# Altium PCB Homodyne_detector.PcbDoc (part 1 of 2)
Units mm, origin at the board's own origin, x right, y up, seen from the top; angles counter-clockwise.
Board outline 120.15 x 50.65 mm, 2 copper layers (TOP, BOT), stack 1.57 mm thick; 115 components, 51 nets, 316 pads, 138 vias.
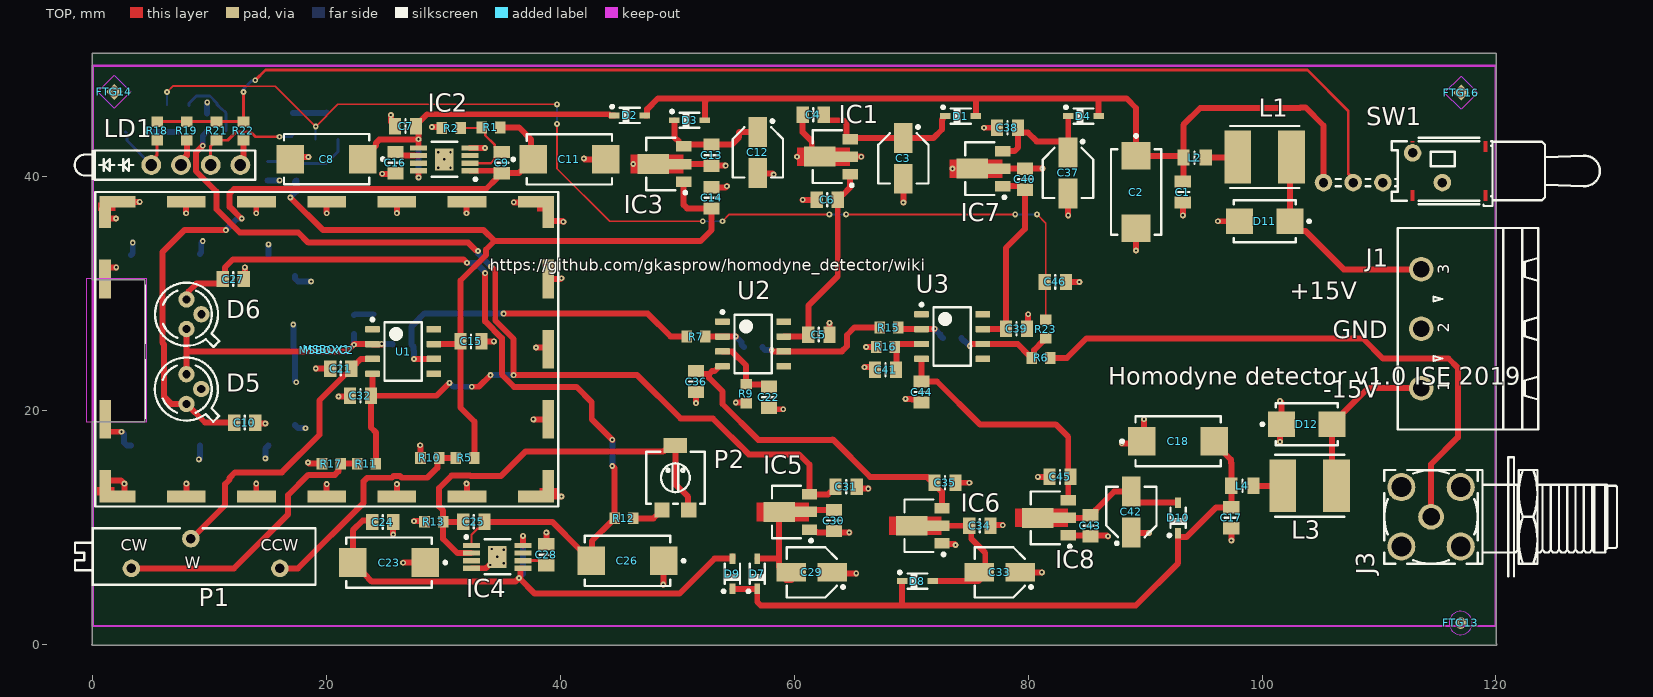
[diagram p0: TOP view]
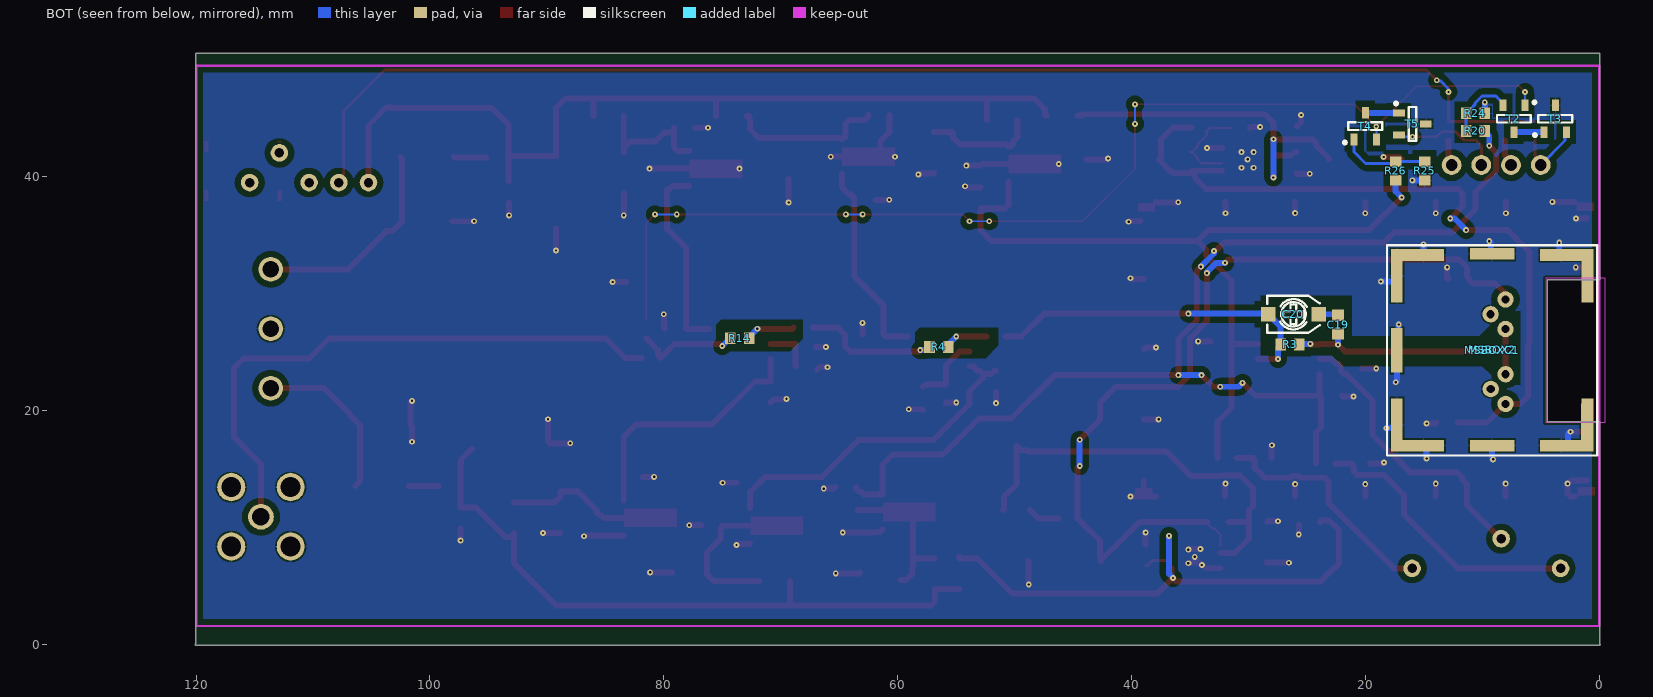
[diagram p1: BOT view, seen from below]
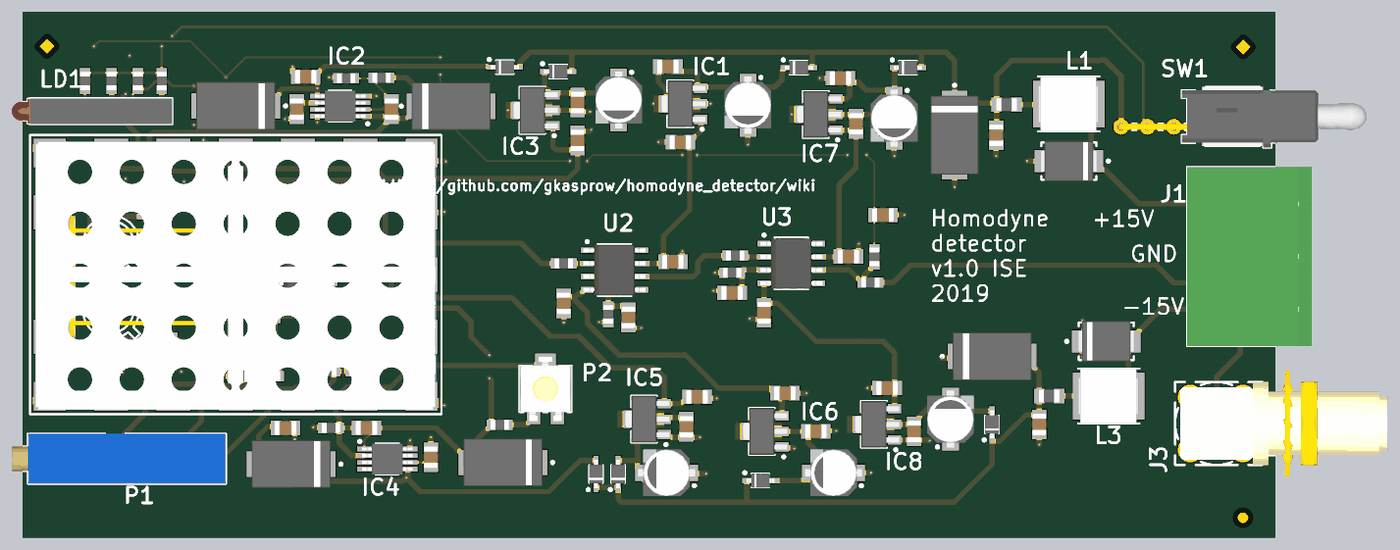
[diagram p2: 3D render of the assembled board from above, using the file's embedded part models]
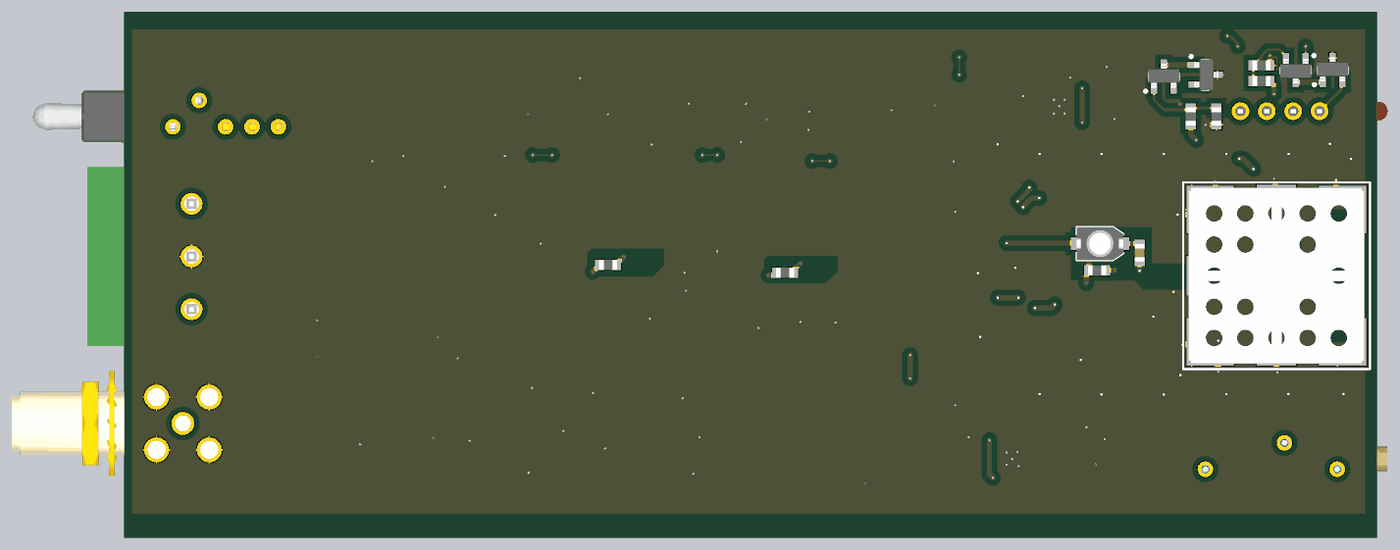
[diagram p3: 3D render of the assembled board from below, using the file's embedded part models]

## Layer stack, top to bottom
TopSolder: solder mask 0.01, Solder Resist, Dk 3.5
TOP: signal copper 0.035
Dielectric2: core 1.5, Core-042, Dk 4.6
BOT: signal copper 0.035
BottomSolder: solder mask 0.01, Solder Resist, Dk 3.5

## Board outline
-0.05,14.499 cw(c0,14.5) -0.05,14.5 -0.05,19 cw(c0,19) 0,19.05 cw(c0,19) 0,19.05 4.45,19.05 4.45,31.2 0,31.2 cw(c0,31.25) -0.05,31.25 -0.05,50.5 cw(c0,50.5) 0,50.55 8.98,50.55 cw(c9.038,50.5) 9.038,50.577 108,50.577 cw(c108,50.5) 108.058,50.55 119.998,50.55 cw(c120,50.5) 120.05,50.5 120.05,0.058 cw(c120,0) 120.077,0 cw(c120,0) 120,-0.077 107,-0.077 cw(c107,0) 106.942,-0.05 10.568,-0.05 cw(c10.51,0) 10.51,-0.077 0,-0.077 cw(c0,0) -0.05,0.058 -0.05,14.5 cw(c0,14.5) -0.05,14.501 -0.05,14.499 ccw(c0,14.5)
cut-out: -0.5,31.302 4.575,31.302 4.575,19 -0.5,19

## Design rules (kind name [scope] priority, off if disabled: settings)
AcuteAngle [All] p1: minimum=6.00000000000000E+0001 checktracksonly=FALSE
Clearance clearance_Z50 [All vs InNetClass('Z50R')] p1: gap=0.152 ignorepadtopadclearanceinfootprint=FALSE
Clearance Clearance_D100 [InNetClass('Z100R')] p2: gap=0.15 ignorepadtopadclearanceinfootprint=FALSE except(0.7: Arc-Poly Track-Poly SMDPad-Poly THPad-Poly Via-Poly Fill-Poly Poly-Poly)
Clearance [All] p3: gap=0.152 ignorepadtopadclearanceinfootprint=FALSE except(0.178: Arc-Via Track-Via SMDPad-Via THPad-Via Via-Via Via-Fill Via-Region Via-Text Via-Hole; 0.254: Poly-Region Poly-Text Poly-Hole; 0.508: Arc-Poly Track-Poly SMDPad-Poly THPad-Poly Via-Poly Fill-Poly Poly-Poly)
DiffPairsRouting [All] p1: maxlimit=0.152 minlimit=0.127 mostfreqgap=0.152 toplayer_minwidth=0.259 toplayer_maxwidth=0.352 toplayer_prefwidth=0.352 bottomlayer_maxgap=0.127 bottomlayer_prefgap=0.127 bottomlayer_minwidth=0.259 bottomlayer_maxwidth=0.263 bottomlayer_prefwidth=0.259 impedanceprofiledriven=TRUE impedanceprofileid={E0909D4E-DC6C-4CAC-BB10-8BE2BD85E6DE} impedanceprofilevalue=100.000000 maxuncoupledlength=12.7
HoleSize [All] p1: absolutevalues=TRUE maxlimit=5.08 minlimit=0.025 maxpercent=80.000 minpercent=20.000
HoleToHoleClearance [All] p1: gap=0.127 allowstackedmicrovias=TRUE
MinimumSolderMaskSliver [All] p1: minsoldermaskwidth=0
MinimumSolderMaskSliver SilkscreenOverComponentPads [All] p2: minsoldermaskwidth=0
PlaneClearance [All] p1: clearance=0.203
PlaneConnect [All] p1: pad.planeconnectstyle=Relief pad.reliefexpansion=0.127 pad.reliefentries=4 pad.reliefconductorwidth=0.127 pad.reliefairgap=0.127 via.planeconnectstyle=Direct via.reliefexpansion=0.508 via.reliefentries=4 via.reliefconductorwidth=0.254 via.reliefairgap=0.254
PolygonConnect [All] p1: thpad.connectstyle=Relief thpad.reliefconductorwidth=0.127 thpad.reliefentries=4 thpad.polygonreliefangle="90 Angle" thpad.airgapwidth=0.127 smdpad.connectstyle=Relief smdpad.reliefconductorwidth=0.127 smdpad.reliefentries=4 smdpad.polygonreliefangle="90 Angle" smdpad.airgapwidth=0.127 via.connectstyle=Direct via.reliefconductorwidth=0.254 via.reliefentries=4 via.polygonreliefangle="90 Angle" via.airgapwidth=0.254
RoomDefinition Homodyne_detector [InComponentClass('Homodyne_detector')] p1 off: confinementstyle=ConfineIn formatcopy=TRUE lockcomponents=FALSE outline 121.152,-0.094 137.179,-0.094 137.179,5.799 121.152,5.799
RoutingVias [All] p1: holewidth=0.2 width=0.5 viastyle="Through Hole" minholewidth=0.2 minwidth=0.5 maxholewidth=0.5 maxwidth=1
SilkToSilkClearance [All] p1: silktosilkclearance=0
SilkToSolderMaskClearance [IsPad] p1: minsilkscreentomaskgap=0 clearancetoexposedcopper=TRUE
SolderMaskExpansion [All] p1: expansion=0.102
ViasUnderSMD ViasUnderSMD_allow [InComponent('IC18') or InComponent('IC10') or InComponent('IC13') or InComponent('IC14') or InComponent('IC15')] p1: allowed=TRUE
ViasUnderSMD [All] p2: allowed=FALSE
Width Width_50R [InNetClass('Z50R')] p1: maxlimit=2.718 minlimit=1 preferedwidth=2.718 toplayer_prefwidth=1 bottomlayer_minwidth=1.611 impedanceprofiledriven=TRUE impedanceprofileid={41EDD86A-3DF9-4644-93D1-EBC5303444B0} impedanceprofilevalue=50.000000 minimp=50.000000 maximp=50.000000 favimp=50.000000 checkconnectedcopper=TRUE
Width [All] p2: maxlimit=2.54 minlimit=0.152 preferedwidth=0.152
22 further rules are at their usual default settings.

## Components (designator, comment, footprint, x,y, rotation, side; value= is the part's Value field where it differs from the comment)
C1 "47nF" CAPC2012X135N 93.225,38.691 r270 top
C2 "22uF" CAPMP7343X190N 89.225,38.691 r270 top
C3 "10uF" CAPAE430X540N 69.321,41.575 r270 top
C4 "47nF" CAPC2012X135N 61.614,45.303 r180 top
C5 "47nF" CAPC2012X135N 62.097,26.5 r0 top
C6 "47nF" CAPC2012X135N 62.81,38.025 r180 top
C7 "47nF" CAPC2012X135N 26.741,44.328 r180 top
C8 "22uF" CAPMP7343X190N 20,41.506 r180 top
C9 "10nF" CAPC2012X135N 34.982,41.206 r270 top
C10 "47nF" CAPC2012X135N 13,18.974 r0 top
C11 "22uF" CAPMP7343X190N 40.75,41.485 r0 top
C12 "10uF" CAPAE430X540N 56.877,42.078 r270 top
C13 "47nF" CAPC2012X135N 52.914,41.85 r270 top
C14 "47nF" CAPC2012X135N 52.914,38.191 r90 top
C15 "47nF" CAPC2012X135N 32.348,25.917 r0 top
C16 "10nF" CAPC2012X135N 25.881,41.206 r90 top
C17 "47nF" CAPC2012X135N 97.375,10.827 r90 top
C18 "22uF" CAPMP7343X190N 92.825,17.377 r0 top
C19 "2.2pF" CAPC1608X87N 22.332,27.356 r90 bottom
C20 "1.5-10pF" CAPV_JOHANSON_9343 26.145,28.239 r0 bottom
C21 "47nF" CAPC2012X135N 21.2,23.592 r180 top
C22 "47nF" CAPC2012X135N 57.825,21.136 r270 top
C23 "22uF" CAPMP7343X190N 25.335,7 r180 top
C24 "47nF" CAPC2012X135N 24.79,10.467 r180 top
C25 "10nF" CAPC2012X135N 32.59,10.484 r0 top
C26 "22uF" CAPMP7343X190N 45.725,7.15 r180 top
C27 "47nF" CAPC2012X135N 12,31.25 r180 top
C28 "10nF" CAPC2012X135N 38.793,7.662 r270 top
C29 "10uF" CAPAE430X540N 61.486,6.16 r180 top
C30 "47nF" CAPC2012X135N 63.387,10.593 r270 top
C31 "47nF" CAPC2012X135N 64.425,13.477 r0 top
C32 "47nF" CAPC2012X135N 22.888,21.266 r180 top
C33 "10uF" CAPAE430X540N 77.565,6.16 r180 top
C34 "47nF" CAPC2012X135N 75.865,10.147 r0 top
C35 "47nF" CAPC2012X135N 72.886,13.827 r0 top
C36 "47nF" CAPC2012X135N 51.588,22.486 r270 top
C37 "10uF" CAPAE430X540N 83.406,40.328 r270 top
C38 "47nF" CAPC2012X135N 78.225,44.191 r180 top
C39 "47nF" CAPC2012X135N 79,27 r0 top
C40 "47nF" CAPC2012X135N 79.725,39.791 r90 top
C41 "47nF" CAPC2012X135N 67.8,23.5 r180 top
C42 "10uF" CAPAE430X540N 88.825,11.327 r90 top
C43 "47nF" CAPC2012X135N 85.325,10.147 r270 top
C44 "47nF" CAPC2012X135N 70.875,21.586 r270 top
C45 "47nF" CAPC2012X135N 82.725,14.327 r180 top
C46 "47nF" CAPC2012X135N 82.325,31 r0 top
D1 "BAT165" SOD2512X110N 74.225,45.191 r0 top
D2 "BAT165" SOD2512X110N 45.915,45.241 r0 top
D3 "BAT165" SOD2512X110N 51.039,44.828 r0 top
D4 "BAT165" SOD2512X110N 84.725,45.191 r0 top
D5 "InGaAs PIN photodiode" Hamamatsu_TO-18_H 8,21.841 r0 top locked
D6 "InGaAs PIN photodiode" Hamamatsu_TO-18_H 8.012,28.239 r0 top locked
D7 "BAT165" SOD2512X110N 56.825,6.042 r90 top
D8 "BAT165" SOD2512X110N 70.521,5.41 r0 top
D9 "BAT165" SOD2512X110N 54.695,6.042 r90 top
D10 "BAT165" SOD2512X110N 92.825,10.827 r90 top
D11 "SMBJ18A" DIOM5336X265N 100.225,36.191 r180 top
D12 "SMBJ18A" DIOM5336X265N 103.825,18.827 r0 top
FTG13 "Use only in PCB" FIDUCIAL_TOP_C100-200 116.992,1.834 r90 top
FTG14 "Use only in PCB" FIDUCIAL_TOP_S100-200 1.825,47.25 r270 top
FTG16 "Use only in PCB" FIDUCIAL_TOP_S100-200 117.018,47.198 r90 top
IC1 "L78L05ACUTR" SOT89 62.81,41.715 r180 top
IC2 "TPS7A4901DGNT" SOP65P490X110-9N-R157X189 30.064,41.485 r180 top
IC3 "L78L05ACUTR" SOT89 48.571,41.088 r180 top
IC4 "TPS7A3001DGNT" SOP65P490X110-9N-R157X189 34.593,7.487 r0 top
IC5 "L79L05ACUTR" SOT89 59.325,11.327 r180 top
IC6 "L79L05ACUTR" SOT89 70.664,10.147 r180 top
IC7 "L78L05ACUTR" SOT89 75.86,40.691 r180 top
IC8 "L79L05ACUTR" SOT89 81.46,10.827 r180 top
J1 "=Family" PHOENIX_1757255 113.616,27 r90 top locked
J3 "SMA" RF249BT0050GHDW 114.452,10.911 r0 top locked
L1 "100uH" INDM5650X530N 100.225,41.691 r0 top
L2 "1k5@100MHz" INDC2012X110N 94.225,41.639 r0 top
L3 "100uH" INDM5650X530N 104.074,13.557 r0 top
L4 "1k5@100MHz" INDC2012X110N 98.325,13.557 r0 top
LD1 "Red/Green" LED_DIALIGHT_571-0112F 5,41 r0 top locked
MSBOX1 "Metal Screening Box 20 Pins" MSBOX_LAIRD_BMI-S-205-F 20,25.25 r270 top locked
MSBOX2 "Metal Screening Box 8 Pins" MSBOX_LAIRD_BMI-S-202-F 9.15,25.151 r180 bottom locked
MSBOXC1 "Top Cover" MSBOX_LAIRD_BMI-S-202-C 9.15,25.151 r180 bottom locked
MSBOXC2 "Top Cover" MSBOX_LAIRD_BMI-S-205-C 20,25.151 r270 top locked
P1 "100" TRIM_BOURNS_3006P 8.38,7.515 r0 top locked
P2 "1k" TRIM_BOURNS_3314G-1 49.825,14.254 r0 top
R1 "9k1" RESC1608X55N 34.048,44.218 r0 top
R2 "1k1" RESC1608X55N 30.648,44.168 r0 top
R3 "300" RESC1608X55N 26.441,25.654 r0 bottom
R4 "1k2" RESC1608X55N 56.475,25.443 r0 bottom
R5 "9k1" RESC1608X55N 31.825,15.951 r180 top
R6 "51" RESC1608X55N 81.1,24.5 r180 top
R7 "100" RESC1608X55N 51.588,26.332 r180 top
R9 "510" RESC1608X55N 55.875,21.436 r270 top
R10 "Undefined" RESC1608X55N 28.825,15.951 r0 top
R11 "9k1" RESC1608X55N 23.4,15.462 r180 top
R12 "4k3" RESC1608X55N 45.425,10.784 r180 top
R13 "510" RESC1608X55N 29.165,10.484 r0 top
R14 "5k1" RESC1608X55N 73.5,26.197 r0 bottom
R15 "510" RESC1608X55N 68.091,27.1 r180 top
R16 "510" RESC1608X55N 67.8,25.443 r180 top
R17 "Undefined" RESC1608X55N 20.4,15.462 r0 top
R18 "9k1" RESC1608X55N 5.5,43.918 r270 top
R19 "9k1" RESC1608X55N 8.04,43.918 r270 top
R20 "510" RESC1608X55N 10.58,43.918 r0 bottom
R21 "9k1" RESC1608X55N 10.58,43.918 r270 top
R22 "9k1" RESC1608X55N 12.879,43.918 r270 top
R23 "510" RESC1608X55N 81.5,26.967 r270 top
R24 "51" RESC1608X55N 10.58,45.418 r180 bottom
R25 "51" RESC1608X55N 14.926,40.492 r270 bottom
R26 "510" RESC1608X55N 17.4,40.492 r90 bottom
SW1 "Switch" SW_NKK_A13AV 107.795,39.5 r180 top locked
T2 "BC847B" SOT95P230X110-3N 7.29,44.959 r270 bottom
T3 "BC857B" SOT95P230X110-3N 3.75,44.959 r90 bottom
T4 "BC847B" SOT95P230X110-3N 20,44.328 r90 bottom
T5 "BC857B" SOT95P230X110-3N 15.972,44.518 r180 bottom
U1 "OPA847ID" D0008A_L 26.54,25.052 r0 top
U2 "OPA847ID" D0008A_L 56.475,25.697 r0 top
U3 "OPA847ID" D0008A_L 73.5,26.332 r0 top

## Footprints (in the part's own frame and the unit in brackets; to place one, negate y for a bottom-side part, rotate by r counter-clockwise, add the part's x,y. Pads: shape width x height; smd on the part's side, far side on the other; paste and mask are expansions set on the pad)
CAPAE430X540N [mm] "Capacitor, Aluminium Electrolytric, 4.3mm L X 4.3mm W X 5.4mm H, IPC Medium Density"
  rect 2.55x1.6 smd: 1(-1.75,0) 2(1.75,0)
  silkscreen extent -2.8,-2.15 2.15,2.15, body extent -2.75,-2.25 2.75,2.25, height 5.7
CAPC1608X87N [mm] "Chip Capacitor, Body 1.6x0.8mm IPC Medium Density"
  rect 0.95x1 smd: 1(-0.8,0) 2(0.8,0)
  body extent -0.87,-0.47 0.88,0.48, height 0.87
CAPC2012X135N [mm] "Chip Capacitor, Body 2.0x1.25mm, IPC Medium Density"
  rect 1.05x1.4 smd: 1(-0.9,0) 2(0.9,0)
  silkscreen extent 0,-0.58 0,0.58, body extent -1.05,-0.67 1.05,0.68, height 1.25
CAPMP7343X190N [mm] "Capacitor, Polarized, Molded  Body 7.3x4.3mm, IPC Medium Density"
  rect 2.35x2.45 smd: 1(-3.1,0) 2(3.1,0)
  silkscreen extent -4.92,-2.15 3.65,2.15, body extent -3.8,-2.3 3.8,2.3, height 1.9
CAPV_JOHANSON_9343 [mil] "JOHANSON 9343 Serie, Single Turn Trimmer Capacitor, Body 4.49x3.175mm"
  rect 50x48 smd: 1(-85,0) 2(85,0)
  silkscreen extent -88,-62 88,62, body extent -88,-62 88,63, height 70
D0008A_L [mm] "SOIC, 8-Leads, Body 5x4mm, Pitch 1.27mm, IPC High Density"
  rrect18% 1.25x0.55 smd: 1(-2.625,1.905) 2(-2.625,0.635) 3(-2.625,-0.635) 4(-2.625,-1.905) 5(2.625,-1.905) 6(2.625,-0.635) 7(2.625,0.635) 8(2.625,1.905)
  silkscreen extent -2.75,-2.5 1.6,2.85, body extent -3,-2.45 3,2.45, height 1.63
DIOM5336X265N [mm] "DO-214-AA/SMB Diode, Molded Body; 5.34mm L X 3.625mm W X 2.65mm H, IPC Medium Density"
  rect 2.3x2.15 smd: 1(-2.15,0) 2(2.15,0)
  silkscreen extent -3.93,-1.8 2.65,1.8, body extent -2.7,-1.95 2.7,1.95, height 2.4
FIDUCIAL_TOP_C100-200 [mm] "Round Fiducial Target, Top Layer, 1.0mm, Top Solder 2.0mm, Keepout =2.0mm"
  round 1 smd paste-0.51 mask+0.5: FTG2(0,0)
  TOP keep-out circle w0.1: c0,0 r1
FIDUCIAL_TOP_S100-200 [mm] "Square Fiducial Target, Top Layer, 1.0mm, Top Solder 2.0mm, Keepout =2.0mm"
  rect 1x1 smd rot 45 paste-0.51 mask+0.5: 1(0,0)
  TOP keep-out region: 1.414,0 0,-1.414 -1.414,0 0,1.414
Hamamatsu_TO-18_H [mm] "TO-18, 3 Leads with Flat Window, 5.4 mm D X 2.68mm H"
  round 1.4 hole 0.7: 1(0,-1.27) 2(1.27,0) 3(0,1.27)
  silkscreen extent -3.47,-2.8 2.8,2.7, body extent -6.15,-2.8 9.73,2.7, height 2.7
INDC2012X110N [mm] "Chip Inductor, EIA 0805, Metric 2012, Body 2.0x1.2mm, IPC Medium Density"
  rect 1.05x1.4 smd: 1(-0.95,0) 2(0.95,0)
  silkscreen extent 0,-0.53 0,0.53, body extent -1,-0.62 1,0.63, height 1.1
INDM5650X530N [mm] "Molded Inductor, 2-Leads, Body 5.6x5.0mm, IPC Medium Density"
  rect 2.3x4.5 smd: 1(-2.3,0) 2(2.3,0)
  silkscreen extent -2.95,-2.65 2.95,2.65, body extent -2.95,-2.65 2.85,2.65, height 5.3
LED_DIALIGHT_571-0112F [mm] "2x 2mm LED (Top: Red, Bot: Green) PCB Edge Mounting (Without positioning pins) DIALIGHT 571 Serie"
  round 1.7 hole 1: 1(0,0) 2(2.54,0) 3(5.08,0) 4(7.62,0)
  silkscreen extent -6.55,-1.24 8.89,1.24, body extent -6.55,-1.24 8.89,1.24, height 8.61
MSBOX_LAIRD_BMI-S-202-C [mm] "Cover for Frame of Standard Surface Mount Shield (Two Piece), External Dimensions 16.5 x 16.5mm"
  body extent -8.48,-8.48 8.48,8.48, height 3.73
MSBOX_LAIRD_BMI-S-202-F [mm] "Frame of Standard Surface Mount Shield (Two Piece), External Dimensions 16.5 x 16.5mm"
  rect 1x4.55 smd: 1(-8.15,6.375) 3(-8.15,-6.375) 5(8.15,-6.375) 7(8.15,6.375)
  rect 3.55x1 smd: 1(-5.875,8.15) 3(-5.875,-8.15) 5(5.875,-8.15) 7(5.875,8.15)
  rect 1x3.8 smd: 2(-8.15,0) 6(8.086,-6.439)
  rect 3.8x1 smd: 4(0,-8.15) 8(0,8.25)
  silkscreen extent -9,-9 9,9, body extent -8.3,-8.3 8.3,8.3, height 3.6
MSBOX_LAIRD_BMI-S-205-C [mm] "Cover for Frame of Standard Surface Mount Shield (Two Piece), External Dimensions 25.86 x 38.56mm"
  body extent -12.93,-19.28 12.93,19.28, height 6.13
MSBOX_LAIRD_BMI-S-205-F [mm] "Frame of Standard Surface Mount Shield (Two Piece), External Dimensions 25.4 x 38.1mm"
  rect 1x3.1 smd: 1(-12.6,17.9) 7(-12.6,-17.9) 11(12.6,-17.9) 17(12.6,17.9)
  rect 1.75x1 smd: 1(-11.225,18.95) 7(-11.225,-18.953) 11(11.225,-18.95) 17(11.225,18.95)
  rect 1x3.3 smd: 2(-12.6,12) 3(-12.6,6) 4(-12.6,0) 5(-12.6,-6) 6(-12.6,-12) 12(12.6,-12) 13(12.6,-6) 14(12.6,0) 15(12.6,6) 16(12.6,12)
  rect 3.3x1 smd: 8(-6,-18.957) 9(6,-18.95) 10(6,-18.95) 18(6,18.95) 19(0,18.95) 20(-6,18.95)
  silkscreen extent -13.45,-19.8 13.45,19.8, body extent -12.75,-19.1 12.75,19.1, height 6
PHOENIX_1757255 [mm] "PHOENIX MSTBA Serie, Pitch 5.08mm, 12A, 250V, 3 Positions Header"
  round 2.1 hole 1.4: 1(-5.08,0) 2(0,0) 3(5.08,0)
  silkscreen extent -8.62,-10 8.62,2, body extent -8.62,-10 8.62,2, height 8.6
RESC1608X55N [mm] "Chip Resistor, EIA 0603, Metric 1608, Body 1.6x0.8mm, IPC Medium Density"
  rect 0.9x1 smd: 1(-0.8,0) 2(0.8,0)
  body extent -0.87,-0.47 0.88,0.48, height 0.55
RF249BT0050GHDW [mm] "50 Ohm Through Hole SMA Right Angle PCB Jack"
  round 2.2 hole 1.5: 1(0,0)
  round 2.4 hole 1.7: 2(-2.54,-2.54) 2(-2.54,2.54) 2(2.54,-2.54) 2(2.54,2.54)
  silkscreen extent -4,-5.1 15.9,5.1, body extent -3.5,-5.1 16.47,5.1, height 11.45
SOD2512X110N [mm] "Small Outline Diode (SOD-323), 1.70mm W X 1.25mm L X 1.10mm H body,  IPC Medium Density"
  rect 0.9x0.5 smd: 1(-1.3,0) 2(1.3,0)
  silkscreen extent -1.62,-0.65 0.85,0.87, body extent -1.35,-0.67 1.35,0.68, height 1.1
SOP65P490X110-9N-R157X189 [mm] "SOP,0.65mm,pitch; 8 pin,3.00mm W X 3.00mm L X 1.10mm H body (w/thermal tab 1.57 X 1.89 mm), IPC Medium Density"
  rect 1.45x0.45 smd: 1(-2.2,0.975) 2(-2.2,0.325) 3(-2.2,-0.325) 4(-2.2,-0.975) 5(2.2,-0.975) 6(2.2,-0.325) 7(2.2,0.325) 8(2.2,0.975)
  rect 1.57x1.89 smd: 9(0,0)
  silkscreen extent -2.78,-1.5 1.1,1.82, body extent -2.45,-1.47 2.45,1.48, height 1.1
SOT89 [mm] "SOT89-3, 3-Leads, Body 2.48x4.5mm"
  rect 1.3x0.9 smd: 1(-1.965,1.5) 3(-1.965,-1.5)
  rect 1.9x0.9 smd: 2(-1.665,0)
  rect 2.7x1.7 smd: 2(0.635,0)
  silkscreen extent -2.23,-2.25 1.24,2.57, body extent -2.44,-2.25 1.81,2.25, height 1.6
SOT95P230X110-3N [mm] "SOT23, 3 pin, Pitch 0.95mm - 1.3mm W X 2.9mm L X 1.1mm H, IPC Medium Density"
  rect 1x0.6 smd: 1(-1.15,0.95) 2(-1.15,-0.95) 3(1.15,0)
  silkscreen extent -1.52,-1.45 0.33,1.87, body extent -1.08,-1.5 1.25,1.5, height 1.1
SW_NKK_A13AV [mm] "BBody 5x10.2mm, Vertical Right Angle PCB Mounting, SPDT ON-OFF-ON Switch, NKK A Series"
  round 1.5 hole 0.8: 1(2.54,0) 2(0,0) 3(-2.54,0) 4(-7.62,0) 4(-5.08,-2.54)
  TOP region: -11.456,1.549 -11.456,1.549 -11.151,1.549 -11.151,0.66 -11.456,0.66
  TOP region: -11.456,-2.642 -11.456,-2.642 -11.151,-2.642 -11.151,-3.531 -11.456,-3.531
  TOP region: -5.233,-3.45 -4.928,-3.45 -4.928,-3.531 -5.233,-3.531
  TOP region: -5.233,1.549 -5.233,1.549 -4.928,1.549 -4.928,0.66 -5.233,0.66
  silkscreen extent -21.1,-3.84 1.48,2.01, body extent -21.09,-3.84 2.84,2.01, height 10.19
TRIM_BOURNS_3006P [mm] "Trimming Potentiometer BOURNS 3006P Series"
  round 1.5 hole 0.8: 1(7.62,-1.015) 2(0,1.525) 3(-5.08,-1.015)
  silkscreen extent -9.9,-2.42 10.67,2.42, body extent -9.9,-2.41 10.67,2.42, height 6.35
TRIM_BOURNS_3314G-1 [mm] "Bourns 3314G-1 Single Turn 4mm Square Trimpot® Trimming Potentiometer (Top Adjust)"
  rect 1.3x1.3 smd: 1(1.15,-2.75) 3(-1.15,-2.75)
  rect 2x1.3 smd: 2(0,2.75)
  silkscreen extent -2.5,-2.24 2.5,2.24, body extent -2.5,-3.1 2.5,3.1, height 2.73

## Part data
C1 C4 C5 C6 C7 C10 C13 C14 C15 C17 C21 C22 C24 C27 C30 C31 C32 C34 C35 C36 C38 C39 C40 C41 C43 C44 C45 C46: library part CC0805_47NF_25V_5%_C0G, "Non-polarised capacitor", Case=0805, Manufacturer=GENERIC, Manufacturer1 ComponentHeight=1.4mm, Manufacturer1 Example=KEMET, Manufacturer1 Part Number=C0805C473J3GACTU, Tolerance=±5%, Voltage=25V, Author="CERN DEM JLC", Component Type=Standard, CreateDate=18.01.2011, HelpURL="\\cern.ch\dfs\Applications\Altium\Datasheets\CC0805_C0G_KEMET_(Commercial Grade).pdf", LatestRevisionDate=18.01.2011, Manufacturer Part Number=CC0805_47NF_25V_5%_C0G, Mounted=Yes, Part Description="SMD Multilayer Chip Ceramic Capacitor", Part Number=CC0805_47NF_25V_5%_C0G, Pin Count=2, Sense=No, SMD=Yes, Socket=No, Status=None, TC=C0G/NP0
C2 C8 C11 C18 C23 C26: library part CTE7343-19_22UF_20V_20%_LESR0045_KEMET_T520, "Polarised capacitor", Case=V, Manufacturer=KEMET, Manufacturer Part Number=T520V226M020ATE045, Tolerance=±20%, Voltage=20V, Author="CERN DEM JLC", ComponentHeight=1.9mm, Component Type=Standard, CreateDate=05.02.2009, HelpURL=\\cern.ch\dfs\Applications\Altium\Datasheets\CTE-LESR_KEMET_T520.pdf, LatestRevisionDate=23.03.2016, Mounted=Yes, Part Description="Low ESR 0R045 Tantalum Chip Capacitor", Part Number=CTE7343-19_22UF_20V_20%_LESR0045_KEMET_T520, Pin Count=2, Sense=No, SMD=Yes, Socket=No, Status=None
C3 C12 C29 C33 C37 C42: library part CAE430-540_10UF_25V_20%, "Polarised capacitor", Case=B, Manufacturer=PANASONIC, Manufacturer Part Number=EEEFK1E100AR, Tolerance=±20%, Voltage=25V, Author="CERN DEM JLC", ComponentHeight=5.8mm, Component Type=Standard, CreateDate=03.12.2007, HelpURL=\\cern.ch\dfs\Applications\Altium\Datasheets\CAE_PANASONIC_FK.pdf, LatestRevisionDate=05.11.2014, Mounted=Yes, Part Description="Aluminum Electrolytic SMT Capacitor", Part Number=CAE430-540_10UF_25V_20%, Pin Count=2, Sense=No, SMD=Yes, Socket=No, Status="Not Recommended"
C9 C16 C25 C28: library part CC0805_10NF_50V_5%_C0G, "Non-polarised capacitor", Case=0805, Manufacturer=GENERIC, Manufacturer1 ComponentHeight=0.88mm, Manufacturer1 Example=KEMET, Manufacturer1 Part Number=C0805C103J5GACTU, Tolerance=±5%, Voltage=50V, Author="CERN DEM JLC", Component Type=Standard, CreateDate=02.02.2011, HelpURL="\\cern.ch\dfs\Applications\Altium\Datasheets\CC0805_C0G_KEMET_(Commercial Grade).pdf", LatestRevisionDate=22.04.2015, Manufacturer Part Number=CC0805_10NF_50V_5%_C0G, Mounted=Yes, Part Description="SMD Multilayer Chip Ceramic Capacitor", Part Number=CC0805_10NF_50V_5%_C0G, Pin Count=2, Sense=No, SMD=Yes, Socket=No, Status=None, TC=C0G/NP0
C19: library part CC0603_2.2PF_50V_0.25PF_NP0, "Non-polarised capacitor", Case=0603, Manufacturer=GENERIC, Manufacturer1 ComponentHeight=0.87mm, Manufacturer1 Example=PHYCOMP, Manufacturer1 Part Number=223886715228, Tolerance=±0.25pF, Voltage=50V, Author="CERN DEM JLC", Component Type=Standard, CreateDate=03.12.2007, HelpURL=\\cern.ch\dfs\Applications\Altium\Datasheets\CC0603_NP0_PHYCOMP.pdf, LatestRevisionDate=03.12.2007, Manufacturer Part Number=CC0603_2.2PF_50V_0.25PF_NP0, Mounted=Yes, Part Description="SMD Multilayer Chip Ceramic Capacitor", Part Number=CC0603_2.2PF_50V_0.25PF_NP0, Pin Count=2, Sense=No, SMD=Yes, Socket=No, Status=Preferred, TC=C0G/NP0
C20: library part CADJ_1.5-10PF_50V_JOHANSON_9343-14R1, "Adjustable Capacitor", Manufacturer=JOHANSON, Manufacturer Part Number=9343-14R1, Voltage=50V, Author="CERN DEM JLC", Component Type=Standard, CreateDate=14.01.2014, HelpURL=\\cern.ch\dfs\Applications\Altium\Datasheets\CADJ_JOHANSON_9343.pdf, LatestRevisionDate=14.01.2014, Mounted=Yes, Part Description="SMD Single Turn Ceramic Trimmer (Adjustable) Capacitor", Part Number=CADJ_1.5-10PF_50V_JOHANSON_9343-14R1, Pin Count=2, Sense=No, SMD=Yes, Socket=No, Status=None
D1 D2 D3 D4 D7 D8 D9 D10: "Schottky Diode", Case=SOD323, Manufacturer=INFINEON, Power=750mA, Voltage=40V, Author="CERN DEM JLC", Bonding=No, ComponentHeight=1.1mm, Component Type=Standard, CreateDate=12.11.2014, Device=BAT165, HelpURL=\\cern.ch\dfs\Applications\Altium\Datasheets\BAT165.pdf, LatestRevisionDate=12.11.2014, Manufacturer Part Number=BAT165, Mounted=Yes, PackageDescription="Small Outline Diode (SOD-323), 1.70mm W X 1.25mm L X 1.10mm H body,  IPC Medium Density", Part Description="Medium Power AF Schottky Diode", Part Number=BAT165, Pin Count=2, PressFit=No, Sense=No, SMD=Yes, Socket=No
D5 D6: "High Speed InGaAs Photodiode, Optical Communications, Single/Multi-Mode Fiber Optic Receiver", Case=TO-18, Manufacturer=Hamamatsu, Manufacturer Part Number=G12180-003A, Author=GK, Bonding=No, ComponentHeight=3.75mm, Component Type=Standard, CreateDate=27.08.2019, Device="InGaAs PIN photodiode", HelpURL=\\cern.ch\dfs\Applications\Altium\Datasheets\FCI-InGaAs-120.pdf, LatestRevisionDate=27.08.2019, Mounted=Yes, PackageDescription="TO-18, 3 Leads with Micro Lense, 5.4 mm D X 3.75mm H", Part Description="InGaAs PIN photodiode", Part Number=G12180-003A, Pin Count=3, PressFit=No, Sense=No, SMD=No, Socket=No
D11 D12: "Zener Diode", Case=DO-214AA, Manufacturer="FAIRCHILD SEMICONDUCTOR", Power=600W, Voltage=18V, Author="CERN DEM JMW", Bonding=No, ComponentHeight=2.65mm, Component Type=Standard, CreateDate=10.07.2015, Device=SMBJ18A, HelpURL=\\cern.ch\dfs\Applications\Altium\Datasheets\SMBJ.pdf, LatestRevisionDate=10.07.2015, Manufacturer Part Number=SMBJ18A, Mounted=Yes, PackageDescription="DO-214-AA/SMB Diode, Molded Body; 5.34mm L X 3.625mm W X 2.65mm H, IPC Medium Density", Part Description="Uni-Directional Transient Voltage Suppressor Diode", Part Number=SMBJ18A, Pin Count=2, PressFit=No, Sense=No, SMD=Yes, Socket=No
FTG13: library part FIDUCIAL_TARGET_C100-200, "Fiducial Target", Author="CERN DEM JLC", ComponentHeight=0mm, Component Type="Standard (No BOM)", CreateDate=09.02.2010, Family=Fiducial, HelpURL=Undefined, LatestRevisionDate=04.04.2012, Mounted=No, PackageDescription="Round Fiducial Target, Top Layer, 1.0mm, Top Solder 2.0mm, Keepout =2.0mm", Part Description="Round Fiducial Target, Top Layer, 1.0mm, Top Solder 2.0mm, Keepout =2.0mm", Part Number=FIDUCIAL_TARGET_C100-200, Pin Count=1, Sense=No, SMD=Yes, Socket=No, Status=None
FTG14 FTG16: library part FIDUCIAL_TARGET_S100-200, "Fiducial Target", Author="CERN DEM JLC", ComponentHeight=0mm, Component Type="Standard (No BOM)", CreateDate=09.02.2010, Family=Fiducial, HelpURL=Undefined, LatestRevisionDate=04.04.2012, Mounted=No, PackageDescription="Square Fiducial Target, Top Layer, 1.0mm, Top Solder 2.0mm, Keepout =2.0mm", Part Description="Square Fiducial Target, Top Layer, 1.0mm, Top Solder 2.0mm, Keepout =2.0mm", Part Number=FIDUCIAL_TARGET_S100-200, Pin Count=1, Sense=No, SMD=Yes, Socket=No, Status=None
IC1 IC3 IC7: "3-Terminal Regulator 1=OUT 2=GND 3=IN", Case=SOT89, Manufacturer="ST MICROELECTRONICS", Author="CERN DEM JLC", Bonding=No, ComponentHeight=1.6mm, Component Type=Standard, CreateDate=10.10.2011, Device=L78L05ACUTR, HelpURL=\\cern.ch\dfs\Applications\Altium\Datasheets\L78L05ACUTR.pdf, LatestRevisionDate=06.12.2011, Manufacturer Part Number=L78L05ACUTR, Mounted=Yes, PackageDescription="SOT89-3, 3-Leads, Body 2.44x4.5mm", Part Description="5V 100mA Positive Voltage Regulator", Part Number=L78L05ACUTR, Pin Count=4, PressFit=No, Sense=No, SMD=Yes, Socket=No
IC2: "+36V, +150mA, Ultralow-Noise, Positive Linear Regulator", Case=TSSOP8, Manufacturer="TEXAS INSTRUMENTS", Author="CERN DEM JLC", Bonding=No, ComponentHeight=1.1mm, Component Type=Standard, CreateDate=08.03.2011, Device=TPS7A4901DGNT, HelpURL=\\cern.ch\dfs\Applications\Altium\Datasheets\TPS7A4901DGNT.pdf, LatestRevisionDate=08.03.2011, Manufacturer Part Number=TPS7A4901DGNT, Mounted=Yes, PackageDescription="SOP,0.65mm,pitch; 8 pin,3.00mm W X 3.00mm L X 1.10mm H body (w/thermal tab 1.57 X 1.89 mm), IPC Medium Density", Part Description="+36V, +150mA, Ultralow-Noise, Positive Linear Regulator", Part Number=TPS7A4901DGNT, Pin Count=9, PressFit=No, Sense=No, SMD=Yes, Socket=No
IC4: "-36V, -200mA, Ultralow-Noise, Negative Linear Regulator", Case=TSSOP8, Manufacturer="TEXAS INSTRUMENTS", Author="CERN DEM JLC", Bonding=No, ComponentHeight=1.1mm, Component Type=Standard, CreateDate=08.03.2011, Device=TPS7A3001DGNT, HelpURL=\\cern.ch\dfs\Applications\Altium\Datasheets\TPS7A3001DGNT.pdf, LatestRevisionDate=08.03.2011, Manufacturer Part Number=TPS7A3001DGNT, Mounted=Yes, PackageDescription="SOP,0.65mm,pitch; 8 pin,3.00mm W X 3.00mm L X 1.10mm H body (w/thermal tab 1.57 X 1.89 mm), IPC Medium Density", Part Description="-36V, -200mA, Ultralow-Noise, Negative Linear Regulator", Part Number=TPS7A3001DGNT, Pin Count=9, PressFit=No, Sense=No, SMD=Yes, Socket=No
IC5 IC6 IC8: "3-Terminal Regulator 1=GND 2=IN 3=OUT 4=IN", Case=SOT89, Manufacturer="ST MICROELECTRONICS", Author="CERN DEM JLC", Bonding=No, ComponentHeight=1.6mm, Component Type=Standard, CreateDate=29.03.2012, Device=L79L05ACUTR, HelpURL=\\cern.ch\dfs\Applications\Altium\Datasheets\L79L05ACUTR.pdf, LatestRevisionDate=29.03.2012, Manufacturer Part Number=L79L05ACUTR, Mounted=Yes, PackageDescription="SOT89-3, 3-Leads, Body 2.44x4.5mm", Part Description="5V 100mA Negative Voltage Regulator", Part Number=L79L05ACUTR, Pin Count=4, PressFit=No, Sense=No, SMD=Yes, Socket=No
J1: library part PHOENIX_1757255, "Connector 3 Male", Manufacturer="PHOENIX CONTACT", Manufacturer Part Number="1757255 (MSTBA 2,5/ 3-G-5,08)", Author="CERN DEM JLC", ComponentHeight=8.6mm, Component Type=Standard, CreateDate=10.02.2010, HelpURL=\\cern.ch\dfs\Applications\Altium\Datasheets\PHOENIX_1757255.pdf, LatestRevisionDate=26.04.2010, Mounted=Yes, Part Description="12A, 250V, Pitch 5.08mm, 3 Positions Header", Part Number=PHOENIX_1757255, Pin Count=3, PressFit=No, Sense=No, SMD=No, Socket=No, Status=None
J3: "50 Ohm Through Hole SMA Right Angle PCB Jack", Manufacturer=AdamTech, Manufacturer Part Number=RF249BT0050GHDW, Part Number=AdamTech_RF249BT0050GHDW, Author=GK, ComponentHeight=10.44mm, Component Type=Standard, CreateDate=06.10.2016, Family=SMA, HelpURL=\\cern.ch\dfs\Applications\Altium\Datasheets\AMPHENOL_132203.pdf, LatestRevisionDate=06.10.2016, Mounted=Yes, Part Description="50 Ohm Through Hole SMA Right Angle PCB Jack", Pin Count=5, PressFit=No, Sense=No, SMD=No, Socket=No, Status=None
L1 L3: library part IND2220_100UH_10%_EPCOS_B82442H, "Inductor With Core", Case=2220, Manufacturer=EPCOS, Manufacturer Part Number=B82442H1104K000, Power=350mA, Resistance=1.28R, Tolerance=±10%, Author="CERN DEM JLC", ComponentHeight=5.3mm, Component Type=Standard, CreateDate=03.10.2011, HelpURL=\\cern.ch\dfs\Applications\Altium\Datasheets\IND2220_EPCOS_B82442H.pdf, LatestRevisionDate=03.10.2011, Mounted=Yes, Part Description="SMT Inductor SIMID Series", Part Number=IND2220_100UH_10%_EPCOS_B82442H, Pin Count=2, Sense=No, SMD=Yes, Socket=No, Status=None
L2 L4: library part IND0805_WURTH_742792097, Case=0805, Manufacturer="WURTH ELEKTRONIK", Manufacturer Part Number=742792097, Power=1A, Resistance=0.3R, Tolerance=±25%, Author="CERN DEM MR", ComponentHeight=1.1mm, Component Type=Standard, CreateDate=29.06.2017, HelpURL=\\cern.ch\dfs\Applications\Altium\Datasheets\IND0805_WURTH_742792097.pdf, LatestRevisionDate=25.10.2018, Mounted=Yes, Part Description="SMD EMI Suppression Chip Ferrite Bead (WE-CBF Series)", Part Number=IND0805_WURTH_742792097, Pin Count=2, Sense=No, SMD=Yes, Socket=No, Status=None
LD1: library part LED_DIALIGHT_571-0112F, "2x LED  Botom Green, Top Red", Manufacturer=DIALIGHT, Manufacturer Part Number=571-0112F, Author="CERN DEM JLC", Bonding=No, Color=Red/Green, ComponentHeight=8.6mm, Component Type=Standard, CreateDate=09.11.2009, HelpURL=\\cern.ch\dfs\Applications\Altium\Datasheets\LED_DIALIGHT_571-0112F.pdf, LatestRevisionDate=17.03.2010, Mounted=Yes, PackageDescription="2x 2mm LED (Top: Red, Bot: Green) PCB Edge Mounting (Without positioning pins) DIALIGHT 571 Serie", Part Description="Dual 2mm  LEDs, Red Top,Green Bot, CBI® Circuit Board Indicator (Without positioning pins)", Part Number=LED_DIALIGHT_571-0112F, Pin Count=4, PressFit=No, Sense=No, SMD=No, Socket=No
MSBOX1: library part MSBOX_LAIRD_BMI-S-205-F, Manufacturer=LAIRD, Manufacturer Part Number=BMI-S-205-F, Author="CERN DEM JLC", ComponentHeight=6mm, Component Type=Standard, CreateDate=21.06.2017, HelpURL=\\cern.ch\dfs\Applications\Altium\Datasheets\MSBOX_LAIRD_BMI-S-205-F.pdf, LatestRevisionDate=21.06.2017, Mounted=Yes, PackageDescription="Frame of Standard Surface Mount Shield (Two Piece), External Dimensions 25.4 x 38.1mm", Part Description="Frame of Standard Surface Mount Shield (Two Piece), External Dimensions 25.4 x 38.1mm", Part Number=MSBOX_LAIRD_BMI-S-205-F, Pin Count=20, PressFit=No, Sense=No, SMD=Yes, Socket=No, Status=None
MSBOX2: library part MSBOX_LAIRD_BMI-S-202-F, Manufacturer=LAIRD, Manufacturer Part Number=BMI-S-202-F, Author="CERN DEM JLC", ComponentHeight=3.6mm, Component Type=Standard, CreateDate=15.06.2017, HelpURL=\\cern.ch\dfs\Applications\Altium\Datasheets\MSBOX_LAIRD_BMI-S-202-F.pdf, LatestRevisionDate=15.06.2017, Mounted=Yes, PackageDescription="Frame of Standard Surface Mount Shield (Two Piece), External Dimensions 16.5 x 16.5mm", Part Description="Frame of Standard Surface Mount Shield (Two Piece), External Dimensions 16.5 x 16.5mm", Part Number=MSBOX_LAIRD_BMI-S-202-F, Pin Count=8, PressFit=No, Sense=No, SMD=Yes, Socket=No, Status=None
MSBOXC1: library part MSBOX_LAIRD_BMI-S-202-C, "Metal Screening Box - Top Cover 0 Pin", Manufacturer=LAIRD, Manufacturer Part Number=BMI-S-202-C, Author="CERN DEM JLC", ComponentHeight=2mm, Component Type=Standard, CreateDate=15.06.2017, HelpURL=\\cern.ch\dfs\Applications\Altium\Datasheets\MSBOX_LAIRD_BMI-S-202-C.pdf, LatestRevisionDate=15.06.2017, Mounted=Yes, PackageDescription="Cover for Frame of Standard Surface Mount Shield (Two Piece), External Dimensions 16.5 x 16.5mm", Part Description="Cover for Frame of Standard Surface Mount Shield (Two Piece), External Dimensions 16.5 x 16.5mm", Part Number=MSBOX_LAIRD_BMI-S-202-C, Pin Count=0, PressFit=No, Sense=No, SMD=Yes, Socket=No, Status=None
MSBOXC2: library part MSBOX_LAIRD_BMI-S-205-C, "Metal Screening Box - Top Cover 0 Pin", Manufacturer=LAIRD, Manufacturer Part Number=BMI-S-205-C, Author="CERN DEM JLC", ComponentHeight=2mm, Component Type=Standard, CreateDate=21.06.2017, HelpURL=\\cern.ch\dfs\Applications\Altium\Datasheets\MSBOX_LAIRD_BMI-S-205-C.pdf, LatestRevisionDate=21.06.2017, Mounted=Yes, PackageDescription="Cover for Frame of Standard Surface Mount Shield (Two Piece), External Dimensions 25.86 x 38.56mm", Part Description="Cover for Frame of Standard Surface Mount Shield (Two Piece), External Dimensions 25.86 x 38.56mm", Part Number=MSBOX_LAIRD_BMI-S-205-C, Pin Count=0, PressFit=No, Sense=No, SMD=Yes, Socket=No, Status=None
P1: library part TRIM_15T_100R_BOURNS_3006P-1-101LF, "Trimming Potentiometer", Case=3006P, Manufacturer=BOURNS, Manufacturer Part Number=3006P-1-101LF, Power=0.75W, Tolerance=±10%, Author="CERN DEM JLC", ComponentHeight=6.35mm, Component Type=Standard, CreateDate=09.05.2017, HelpURL=\\cern.ch\dfs\Applications\Altium\Datasheets\TRIM_BOURNS_3006P.pdf, LatestRevisionDate=09.05.2017, Mounted=Yes, Part Description="15 Turn Trimming Potentiometer", Part Number=TRIM_15T_100R_BOURNS_3006P-1-101LF, Pin Count=3, PressFit=No, Sense=No, SMD=No, Socket=No, TC=±100ppm/°C
P2: library part TRIM_1T_1K_BOURNS_3314G-1-102E, "Trimming Potentiometer", Case=3314G-1, Manufacturer=BOURNS, Manufacturer Part Number=3314G-1-102E, Power=0.25W, Tolerance=±20%, Author="CERN DEM JLC", ComponentHeight=2.55mm, Component Type=Standard, CreateDate=04.03.2014, HelpURL=\\cern.ch\dfs\Applications\Altium\Datasheets\TRIM_BOURNS_3314G-1.pdf, LatestRevisionDate=04.03.2014, Mounted=Yes, Part Description="Single Turn 4mm Square Trimpot® Trimming Potentiometer (Top Adjust)", Part Number=TRIM_1T_1K_BOURNS_3314G-1-102E, Pin Count=3, PressFit=No, Sense=No, SMD=Yes, Socket=No, TC=±100ppm/°C
R1 R5 R11 R18 R19 R21 R22: library part R0603_9K1_1%_0.1W_100PPM, "Resistor - 1%", Case=0603, Manufacturer=GENERIC, Manufacturer1 ComponentHeight=0.55mm, Manufacturer1 Example="NIC COMPONENT", Manufacturer1 Part Number=NRC06F9101TRF, Power=0.1W, Tolerance=±1%, Author="CERN DEM JLC", Component Type=Standard, CreateDate=03.12.2007, HelpURL=\\cern.ch\dfs\Applications\Altium\Datasheets\R0603_NIC_NRC.pdf, LatestRevisionDate=13.03.2008, Manufacturer Part Number=R0603_9K1_1%_0.1W_100PPM, Mounted=Yes, Part Description="General Purpose Thick Film Chip Resistor", Part Number=R0603_9K1_1%_0.1W_100PPM, Pin Count=2, PressFit=No, Sense=No, SMD=Yes, Socket=No, Status=Preferred, TC=±100ppm/°C
R2: library part R0603_1K1_1%_0.1W_100PPM, "Resistor - 1%", Case=0603, Manufacturer=GENERIC, Manufacturer1 ComponentHeight=0.55mm, Manufacturer1 Example="NIC COMPONENT", Manufacturer1 Part Number=NRC06F1101TRF, Power=0.1W, Tolerance=±1%, Author="CERN DEM JLC", Component Type=Standard, CreateDate=03.12.2007, HelpURL=\\cern.ch\dfs\Applications\Altium\Datasheets\R0603_NIC_NRC.pdf, LatestRevisionDate=13.03.2008, Manufacturer Part Number=R0603_1K1_1%_0.1W_100PPM, Mounted=Yes, Part Description="General Purpose Thick Film Chip Resistor", Part Number=R0603_1K1_1%_0.1W_100PPM, Pin Count=2, PressFit=No, Sense=No, SMD=Yes, Socket=No, Status=Preferred, TC=±100ppm/°C
R3: library part R0603_300R_1%_0.1W_100PPM, "Resistor - 1%", Case=0603, Manufacturer=GENERIC, Manufacturer1 ComponentHeight=0.55mm, Manufacturer1 Example="NIC COMPONENT", Manufacturer1 Part Number=NRC06F3000TRF, Power=0.1W, Tolerance=±1%, Author="CERN DEM JLC", Component Type=Standard, CreateDate=03.12.2007, HelpURL=\\cern.ch\dfs\Applications\Altium\Datasheets\R0603_NIC_NRC.pdf, LatestRevisionDate=13.03.2008, Manufacturer Part Number=R0603_300R_1%_0.1W_100PPM, Mounted=Yes, Part Description="General Purpose Thick Film Chip Resistor", Part Number=R0603_300R_1%_0.1W_100PPM, Pin Count=2, PressFit=No, Sense=No, SMD=Yes, Socket=No, Status=Preferred, TC=±100ppm/°C
R4: library part R0603_1k2_1%_0.1W_100PPM, "Resistor - 1%", Case=0603, Manufacturer=GENERIC, Manufacturer1 ComponentHeight=0.55mm, Manufacturer1 Example="NIC COMPONENT", Manufacturer1 Part Number=NRC06F1201TRF, Manufacturer Part Number=R0603_1K2_1%_0.1W_100PPM, Power=0.1W, Tolerance=±1%, Author="CERN DEM JLC", Component Type=Standard, CreateDate=03.12.2007, HelpURL=\\cern.ch\dfs\Applications\Altium\Datasheets\R0603_NIC_NRC.pdf, LatestRevisionDate=13.03.2008, Mounted=Yes, Part Description="General Purpose Thick Film Chip Resistor", Part Number=R0603_1K2_1%_0.1W_100PPM, Pin Count=2, PressFit=No, Sense=No, SMD=Yes, Socket=No, Status=Preferred, TC=±100ppm/°C
R6 R24 R25: library part R0603_51R_1%_0.1W_100PPM, "Resistor - 1%", Case=0603, Manufacturer=GENERIC, Manufacturer1 ComponentHeight=0.55mm, Manufacturer1 Example="NIC COMPONENT", Manufacturer1 Part Number=NRC06F51R0TRF, Power=0.1W, Tolerance=±1%, Author="CERN DEM JLC", Component Type=Standard, CreateDate=03.12.2007, HelpURL=\\cern.ch\dfs\Applications\Altium\Datasheets\R0603_NIC_NRC.pdf, LatestRevisionDate=13.03.2008, Manufacturer Part Number=R0603_51R_1%_0.1W_100PPM, Mounted=Yes, Part Description="General Purpose Thick Film Chip Resistor", Part Number=R0603_51R_1%_0.1W_100PPM, Pin Count=2, PressFit=No, Sense=No, SMD=Yes, Socket=No, Status=Preferred, TC=±100ppm/°C
R7: library part R0603_100R_1%_0.1W_100PPM, "Resistor - 1%", Case=0603, Manufacturer=GENERIC, Manufacturer1 ComponentHeight=0.55mm, Manufacturer1 Example="NIC COMPONENT", Manufacturer1 Part Number=NRC06F4700TRF, Power=0.1W, Tolerance=±1%, Author="CERN DEM JLC", Component Type=Standard, CreateDate=03.12.2007, HelpURL=\\cern.ch\dfs\Applications\Altium\Datasheets\R0603_NIC_NRC.pdf, LatestRevisionDate=13.03.2008, Manufacturer Part Number=R0603_100R_1%_0.1W_100PPM, Mounted=Yes, Part Description="General Purpose Thick Film Chip Resistor", Part Number=R0603_100R_1%_0.1W_100PPM, Pin Count=2, PressFit=No, Sense=No, SMD=Yes, Socket=No, Status=Preferred, TC=±100ppm/°C
R9 R13 R15 R16 R20 R23 R26: library part R0603_510R_1%_0.1W_100PPM, "Resistor - 1%", Case=0603, Manufacturer=GENERIC, Manufacturer1 ComponentHeight=0.5mm, Manufacturer1 Example=VISHAY, Manufacturer1 Part Number=CRCW0603510RFKEA, Power=0.1W, Tolerance=±1%, Author="CERN DEM JLC", Component Type=Standard, CreateDate=03.12.2007, HelpURL="\\cern.ch\dfs\Applications\Altium\Datasheets\R0603_VISHAY_CRCW e3.pdf", LatestRevisionDate=21.03.2018, Manufacturer Part Number=R0603_510R_1%_0.1W_100PPM, Mounted=Yes, Part Description="General Purpose Thick Film Chip Resistor", Part Number=R0603_510R_1%_0.1W_100PPM, Pin Count=2, PressFit=No, Sense=No, SMD=Yes, Socket=No, Status=Preferred, TC=±100ppm/°C
R10 R17: library part R0603_NO-VALUE, "Resistor", Case=0603, Author="CERN DEM JLC", Component Type=Standard, CreateDate=03.12.2007, HelpURL=Undefined, LatestRevisionDate=13.03.2008, Manufacturer=Undefined, Manufacturer1 ComponentHeight=Undefined, Manufacturer1 Example=Undefined, Manufacturer1 Part Number=Undefined, Manufacturer Part Number=R0603_NO-VALUE, Mounted=No, Part Description="Reserved Footprint For a 0603 (1608) Chip Resistor", Part Number=R0603_NO-VALUE, Pin Count=2, PressFit=No, Sense=No, SMD=Yes, Socket=No, Status=None
R12: library part R0603_4K3_1%_0.1W_100PPM, "Resistor - 1%", Case=0603, Manufacturer=GENERIC, Manufacturer1 ComponentHeight=0.55mm, Manufacturer1 Example="NIC COMPONENT", Manufacturer1 Part Number=NRC06F4301TRF, Power=0.1W, Tolerance=±1%, Author="CERN DEM JLC", Component Type=Standard, CreateDate=03.12.2007, HelpURL=\\cern.ch\dfs\Applications\Altium\Datasheets\R0603_NIC_NRC.pdf, LatestRevisionDate=13.03.2008, Manufacturer Part Number=R0603_4K3_1%_0.1W_100PPM, Mounted=Yes, Part Description="General Purpose Thick Film Chip Resistor", Part Number=R0603_4K3_1%_0.1W_100PPM, Pin Count=2, PressFit=No, Sense=No, SMD=Yes, Socket=No, Status=Preferred, TC=±100ppm/°C
R14: library part R0603_5K1_1%_0.1W_100PPM, "Resistor - 1%", Case=0603, Manufacturer=GENERIC, Manufacturer1 ComponentHeight=0.55mm, Manufacturer1 Example="NIC COMPONENT", Manufacturer1 Part Number=NRC06F5101TRF, Power=0.1W, Tolerance=±1%, Author="CERN DEM JLC", Component Type=Standard, CreateDate=03.12.2007, HelpURL=\\cern.ch\dfs\Applications\Altium\Datasheets\R0603_NIC_NRC.pdf, LatestRevisionDate=13.03.2008, Manufacturer Part Number=R0603_5K1_1%_0.1W_100PPM, Mounted=Yes, Part Description="General Purpose Thick Film Chip Resistor", Part Number=R0603_5K1_1%_0.1W_100PPM, Pin Count=2, PressFit=No, Sense=No, SMD=Yes, Socket=No, Status=Preferred, TC=±100ppm/°C
SW1: library part SW_NKK_A13AV, "SPDT Switch", Manufacturer="NKK SWITCHES", Manufacturer Part Number=A13AV, Author="CERN DEM MR", ComponentHeight=10.2mm, Component Type=Standard, CreateDate=20.02.2018, Family=Switch, HelpURL=\\cern.ch\dfs\Applications\Altium\Datasheets\SW_NKK_A13AV.pdf, LatestRevisionDate=20.02.2018, Mounted=Yes, PackageDescription="Body 5x10.2mm, Vertical Right Angle PCB Mounting, SPDT ON-OFF-ON Switch, NKK A Series", Part Description="Vertical Right Angle PCB Mounting, SPDT ON-OFF-ON Switch, Cotnact Rating 400mA 28V, NKK A Series", Part Number=SW_NKK_A13AV, Pin Count=5, PressFit=No, Sense=No, SMD=No, Socket=No, Status=None
T2 T4: "NPN Transistor", Case=SOT23-3, Manufacturer="NXP SEMICONDUCTORS", Author="CERN DEM JLC", Bonding=No, ComponentHeight=1.1mm, Component Type=Standard, CreateDate=14.06.2011, Device=BC847B, HelpURL=\\cern.ch\dfs\Applications\Altium\Datasheets\BC847B.pdf, LatestRevisionDate=14.06.2011, Manufacturer Part Number=BC847B, Mounted=Yes, PackageDescription="SOT23, 3 pin, Pitch 0.95mm - 1.3mm W X 2.9mm L X 1.1mm H, IPC Medium Density", Part Description="45V 100mA NPN general-purpose transistors", Part Number=BC847B, Pin Count=3, PressFit=No, Sense=No, SMD=Yes, Socket=No
T3 T5: "PNP Transistor", Case=SOT23-3, Manufacturer="NXP SEMICONDUCTORS", Author="CERN DEM JLC", Bonding=No, ComponentHeight=1.1mm, Component Type=Standard, CreateDate=14.06.2011, Device=BC857B, HelpURL=\\cern.ch\dfs\Applications\Altium\Datasheets\BC857B.pdf, LatestRevisionDate=14.06.2011, Manufacturer Part Number=BC857B, Mounted=Yes, PackageDescription="SOT23, 3 pin, Pitch 0.95mm - 1.3mm W X 2.9mm L X 1.1mm H, IPC Medium Density", Part Description="45V 100mA PNP general-purpose transistors", Part Number=BC857B, Pin Count=3, PressFit=No, Sense=No, SMD=Yes, Socket=No
U1 U2 U3: library part CMP-0018-00371-2, "Wideband, Ultra-Low Noise, Voltage Feedback Operational Amplifier with Shutdown, 10 to 12 V, -40 to 85 degC, 8-pin SOIC (D8), Green (RoHS & no Sb/Br)", Manufacturer="Texas Instruments", 2nd Harmonic(dBc)=105, 3rd Harmonic(dBc)=110, @ MHz=5, Acl, min stable gain(V/V)=12, BW @ Acl(MHz)=600, Code_JEDEC=MS-012, ComponentLink1Description="Manufacturer URL", ComponentLink1URL=http://www.ti.com/, ComponentLink2Description=Datasheet, ComponentLink2URL=http://www.ti.com/general/docs/lit/getliterature.tsp?genericPartNumber=OPA847&fileType=pdf, ComponentLink3Description="Package Specification", ComponentLink3URL=http://www.ti.com/litv/pdf/msoi002j, DatasheetVersion=SBOS251E, Eco-Plan="Green (RoHS & no Sb/Br)", Iib(Max)(nA)=42000, Io(Typ)(mA)=75, Iq per channel(Max)(mA)=18.9, Mounting Technology="Surface Mount", Number of Channels=1, PackageDescription="8-Pin Plastic Small Outline, Body 4.9 x 3.9 mm, Pitch 1.27 mm", PackageReference=D0008A, PackageVersion="4040047-3/M, 06/2011", PartNumber=OPA847ID, Settling Time (0.1%)(Typ)(ns)=20, Slew Rate(Typ)(V/us)=950, Sub Family="High Output Current Amplifier (>=50mA), High Speed Amplifier (>=50MHz), Low Offset Voltage Amplifier (<=500uV)", THD (Fc is 1 MHz)(Typ)(dB)=-96, Vio(Max)(mV)=0.5, Vn at Flatband(Typ)(nV/rtHz)=0.85, Vs(Max)(V)=12, Vs(Min)(V)=10

## Via types
v1: diameter 0.5, hole 0.2, TOP to BOT, tented both sides, 138 vias

## Nets (pads, with @x,y where several pads share a name; then routed paths per layer and width w, separated by ;. In a path a pad name is that pad's centre, name@x,y a point inside that pad or via, vN(x,y) a via of type N, cw(c..) or ccw(c..) an arc to the next point about the centre after c; other vN are vias at no path point)
GND: C1.2 C2.2 C3.2 C4.2 C5.2 C6.2 C7.2 C8.2 C10.2 C11.2 C12.2 C13.2 C14.2 C15.2 C16.1 C17.1 C18.1 C21.2 C22.2 C23.1 C24.1 C26.1 C27.1 C28.1 C29.1 C30.2 C31.2 C32.2 C33.1 C34.2 C35.2 C36.2 C37.2 C38.2 C39.2 C40.2 C41.2 C42.1 C43.2 C44.2 C45.2 C46.2 D5.2 D6.2 D11.2 D12.1 IC1.2 IC2.4 IC2.9 IC3.2 IC4.4 IC4.9 IC5.1 IC6.1 IC7.2 IC8.1 J1.2 J3.2 MSBOX1.1 MSBOX1.2 MSBOX1.3 MSBOX1.4 MSBOX1.5 MSBOX1.6 MSBOX1.7 MSBOX1.8 MSBOX1.9 MSBOX1.10 MSBOX1.11 MSBOX1.12 MSBOX1.13 MSBOX1.14 MSBOX1.15 MSBOX1.16 MSBOX1.17 MSBOX1.18 MSBOX1.19 MSBOX1.20 MSBOX2.1 MSBOX2.2 MSBOX2.3 MSBOX2.4 MSBOX2.5 MSBOX2.6 MSBOX2.7 MSBOX2.8 R2.1 R9.2 R10.1 R13.1 R16.2 R17.1 R24.2 R25.2 T3.3 T5.3 | length 151.5
  TOP w0.508: MSBOX1.8 1.043,31.462 1.289,31.708 1.289,32.25 v1(2,32.25) ; MSBOX1.7@1.047,36.475 1.098,36.424 v1(1.981,36.424) ; MSBOX1.11@1.05,14.025 2.425,14.025 v1(2.7,13.75) 2.7,12.896 2.454,12.65 MSBOX1.11@2.1,12.65 ; MSBOX1.9 1.05,18.432 1.296,18.186 v1(2.454,18.186) ; MSBOX1.7@2.1,37.85 v1(4,37.85) ; v1(7.976,36.881) 7.98,36.886 7.98,37.83 MSBOX1.6 ; MSBOX1.12 v1(8,13.75) ; C27.1 13,31.35 v1(13,32.25) ; C10.2 13.976,18.898 v1(14.757,18.898) ; v1(13.976,13.75) 13.976,12.674 MSBOX1.13 ; v1(13.976,36.881) 13.976,37.826 MSBOX1.5 ; C8.2 17.077,41.682 v1(18.433,41.682) ; v1(18.399,15.56) 18.497,15.462 R17.1 ; v1(19.063,23.604) 20.287,23.604 C21.2 ; MSBOX1.14 v1(20,13.707) ; v1(20,36.881) MSBOX1.4 ; v1(21.006,21.209) 21.931,21.209 C32.2 ; v1(24.75,40.25) 25.825,40.25 C16.1 ; v1(25.491,45.278) 25.491,44.678 C7.2 ; v1(25.691,9.398) C24.1@25.691,10.239 ; MSBOX1.15 v1(26,13.707) ; v1(26,36.886) MSBOX1.3 ; v1(26.54,6.987) 26.553,7 C23.1 ; v1(27.471,10.538) 28.311,10.538 R13.1 ; v1(27.99,17.031) 28.025,16.996 R10.1 ; v1(29,44.25) 29.766,44.25 R2.1 ; v1(31.957,13.75) 32,13.707 MSBOX1.16 ; v1(31.957,36.881) 31.961,36.886 31.961,37.811 MSBOX1.2 ; IC2.4 v1(33.546,42.46) ; IC4.4 33.618,6.512 33.902,6.796 v1(33.982,6.796) 34.062,6.796 IC4.9@34.253,6.987 ; C15.2 v1(34.3,25.917) ; IC4.9@34.104,6.987 IC4.9@34.253,6.987 ; v1(34.104,8.162) 35.082,8.162 v1(35.133,8.111) ; v1(34.593,7.487) 34.593,7.327 IC4.9@34.253,6.987 ; v1(35.133,6.936) 35.082,6.987 IC4.9@34.253,6.987 ; v1(36,37.811) 37.861,37.811 MSBOX1.1@37.9,37.85 ; v1(37.68,19.25) MSBOX1.18 ; v1(37.897,25.4) 38.8,25.4 MSBOX1.19 ; MSBOX1.17@37.9,12.65 MSBOX1.17@38.704,12.65 ; C28.1 v1(38.793,9.577) ; MSBOX1.17@38.95,14.025 38.95,12.896 MSBOX1.17@38.704,12.65 ; MSBOX1.20 40.013,31.25 v1(40.081,31.318) ; MSBOX1.1@39.211,36.197 40.189,36.197 v1(40.241,36.146) ; v1(40.081,12.65) MSBOX1.17@38.704,12.65 ; v1(42,41.556) 42.071,41.485 C11.2 ; v1(46.225,41.091) 47.932,41.091 47.936,41.088 50.236,41.088 52.776,41.088 C13.2 v1(54.125,40.95) ; v1(48.786,5.121) 48.825,5.16 C26.1 ; v1(51.588,20.636) C36.2 ; C14.2 54.125,39.091 v1(54.225,39.191) ; v1(54.989,20.686) 55.825,20.686 R9.2 ; C12.2 56.93,40.275 58.141,40.275 v1(58.225,40.191) ; C22.2@57.824,20.056 57.883,20.115 v1(59.049,20.115) ; v1(60.225,41.715) IC1.2@62.083,41.715 ; v1(60.714,38.025) C6.2 ; C4.2 60.714,43.803 61.487,43.03 61.487,42.311 IC1.2@62.083,41.715 ; IC5.1 61.486,9.631 61.929,9.631 61.983,9.577 v1(64.7,9.577) ; IC1.2@62.083,42.078 IC1.2@62.175,41.987 ; C5.2 63,26.503 v1(63,27.5) ; C29.1 63.322,6.073 v1(65.292,6.073) ; C31.2 65.464,13.338 66.314,13.338 v1(66.325,13.327) ; v1(65.725,41.715) 64.475,41.715 62.446,41.715 IC1.2@62.175,41.987 ; v1(66,23.708) 66.692,23.708 C41.2 ; v1(66.141,25.443) R16.2 ; v1(69.321,37.791) C3.2 ; v1(69.5,21) 70,21 70.043,20.957 70.604,20.957 C44.2 ; IC6.1 72.702,8.574 73.717,8.574 v1(73.786,8.504) ; v1(73.525,40.691) 75.225,40.691 77.525,40.691 C40.2 v1(81.225,40.691) ; C35.2 v1(74.965,13.827) ; v1(76.225,44.191) C38.2 ; C34.2 76.815,10.197 v1(77.825,10.197) ; C33.1 v1(81.168,6.16) ; C39.2 80,27.1 v1(80,28.237) ; v1(80.825,14.327) C45.2 ; C46.2 v1(84.375,31) ; C37.2 83.406,36.71 v1(83.425,36.691) ; IC8.1 86.745,9.327 v1(86.825,9.247) ; v1(88.002,17.2) 89.75,17.2 89.902,17.352 v1(89.902,19.252) ; C42.1 88.875,9.527 v1(90.325,9.527) ; v1(89.225,33.691) C2.2 ; v1(93.225,36.691) C1.2 ; v1(96.225,36.191) D11.2 ; v1(97.375,8.887) C17.1 ; v1(101.533,17.327) 101.533,18.686 D12.1 101.675,20.686 v1(101.533,20.827) ; IC1.2@62.083,41.715 62.175,41.715 IC1.2@62.175,41.987
  BOT w0.508: MSBOX2.6@1,18.776 MSBOX2.6 MSBOX2.6@1.182,18.594 ; v1(2.454,18.186) 2.675,17.965 2.675,17.247 2.921,17.001 MSBOX2.5@3.275,17.001 ; MSBOX2.7@3.275,33.301 3.414,33.44 v1(3.414,34.365) ; v1(9.068,15.824) 9.15,15.906 MSBOX2.4 ; MSBOX2.8 9.27,33.521 9.27,34.365 v1(9.398,34.493) ; R24.2 v1(9.78,46.359) ; v1(14.757,15.906) 14.757,16.755 15.003,17.001 MSBOX2.3@15.025,17.001 ; R25.2 15.965,39.692 v1(15.972,39.685) ; MSBOX2.1@15.025,33.301 v1(15.025,34.214) ; v1(17.146,27.356) 17.146,25.055 MSBOX2.2@17.3,24.901 ; MSBOX2.3@17.3,18.776 17.3,18.737 17.546,18.491 v1(18.186,18.491) ; MSBOX2.2 MSBOX2.2@17.3,24.901 ; MSBOX2.1@17.3,31.526 17.3,31.285 17.546,31.039 v1(18.669,31.039) ; v1(17.4,22.42) 17.3,22.52 MSBOX2.2@17.3,24.901
  other v1: 29.556,40.774 30.584,40.774 30.064,41.485 29.556,42.106 30.584,42.106
N5V0A: C31.1 C32.1 IC5.3 R11.1 R20.1 U1.4 | length 98.1
  TOP w0.508: v1(9.398,42.656) 8.824,42.081 8.824,40.48 10.58,38.723 10.58,37.216 12.566,35.23 17.568,35.23 18.433,34.365 32.106,34.365 v1@32.795,33.676 ; U1.4 23.915,21.393 C32.1 ; R11.1 24.2,18.135 23.788,18.547 C32.1 ; v1(30.5,22.372) 29.394,21.266 C32.1 ; v1(32.41,22.036) 33.014,22.036 v1(34.011,23.033) ; v1(34.061,32.309) 34.417,31.953 34.417,27.699 35.992,26.124 v1(35.992,23.033) 46.553,23.033 50.27,19.316 53.034,19.316 56.1,16.25 60.397,16.25 61.259,15.387 61.29,15.387 IC5.3 62.875,12.827 63.079,13.031 63.254,13.031 63.525,13.302 C31.1
  BOT w0.508: v1(9.398,42.656) 9.398,43.486 9.78,43.868 R20.1 ; v1(30.5,22.372) 30.836,22.036 v1(32.41,22.036) ; v1(32.94,33.649) 32.94,33.43 v1(34.061,32.309) ; v1(34.011,23.033) v1(35.992,23.033)
N5V0B: C35.1 C36.1 IC6.3 U2.4 | length 29